# Altium PCB 2 Layers Matrix.PcbDoc
Units mm, origin at the board's own origin, x right, y up, seen from the top; angles counter-clockwise.
Board outline 70 x 70 mm, 2 copper layers (Top Layer, Bottom Layer), stack 1.569 mm thick; 68 components, 65 nets, 216 pads, 0 vias.
Unrouted connection lines stored in the file: 35.
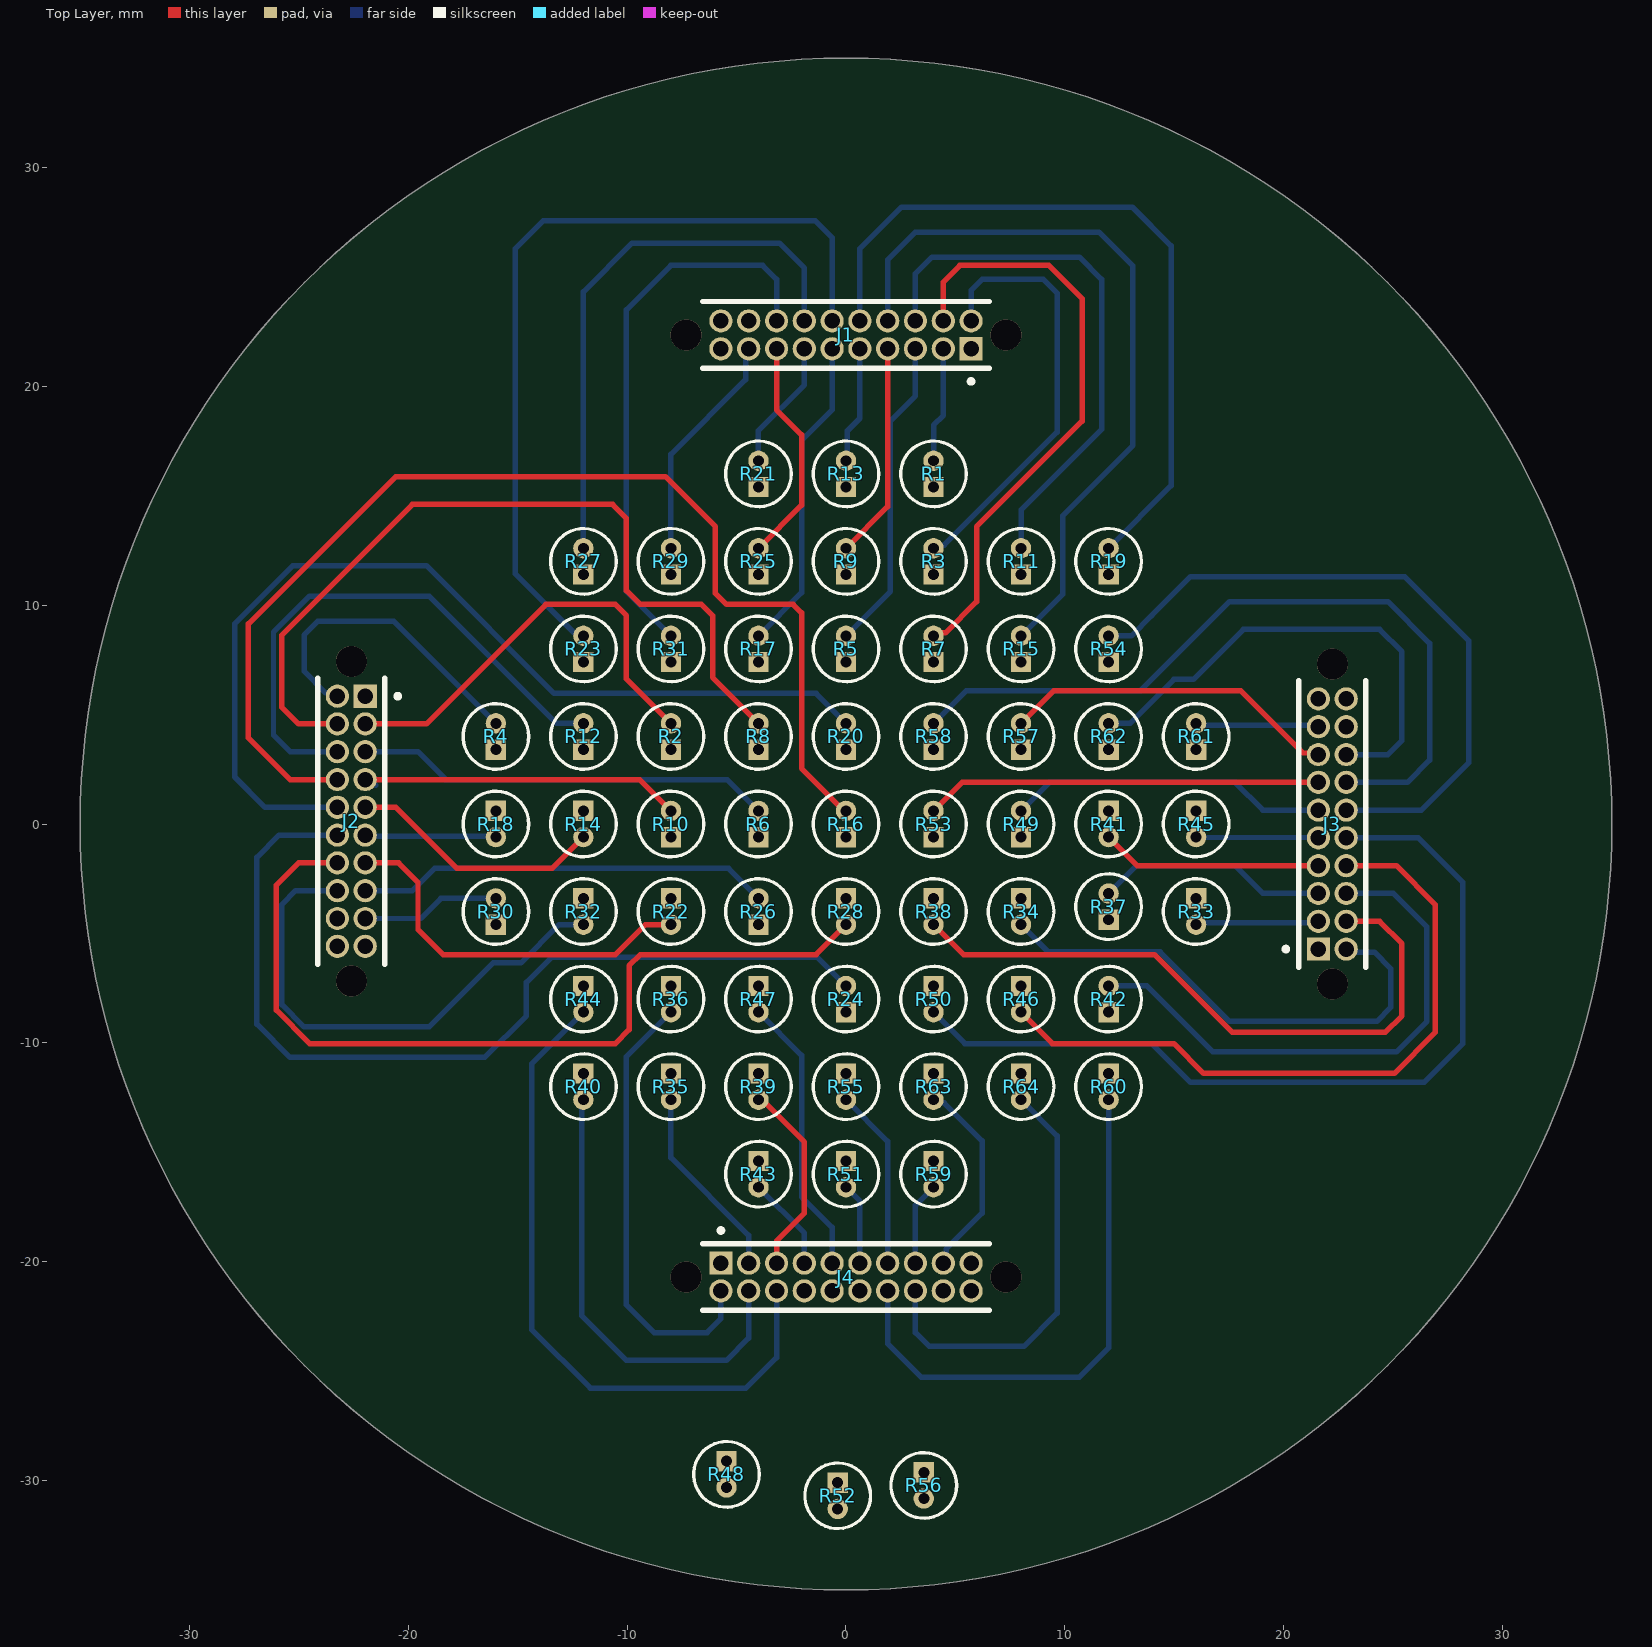
[diagram p0: Top Layer view]
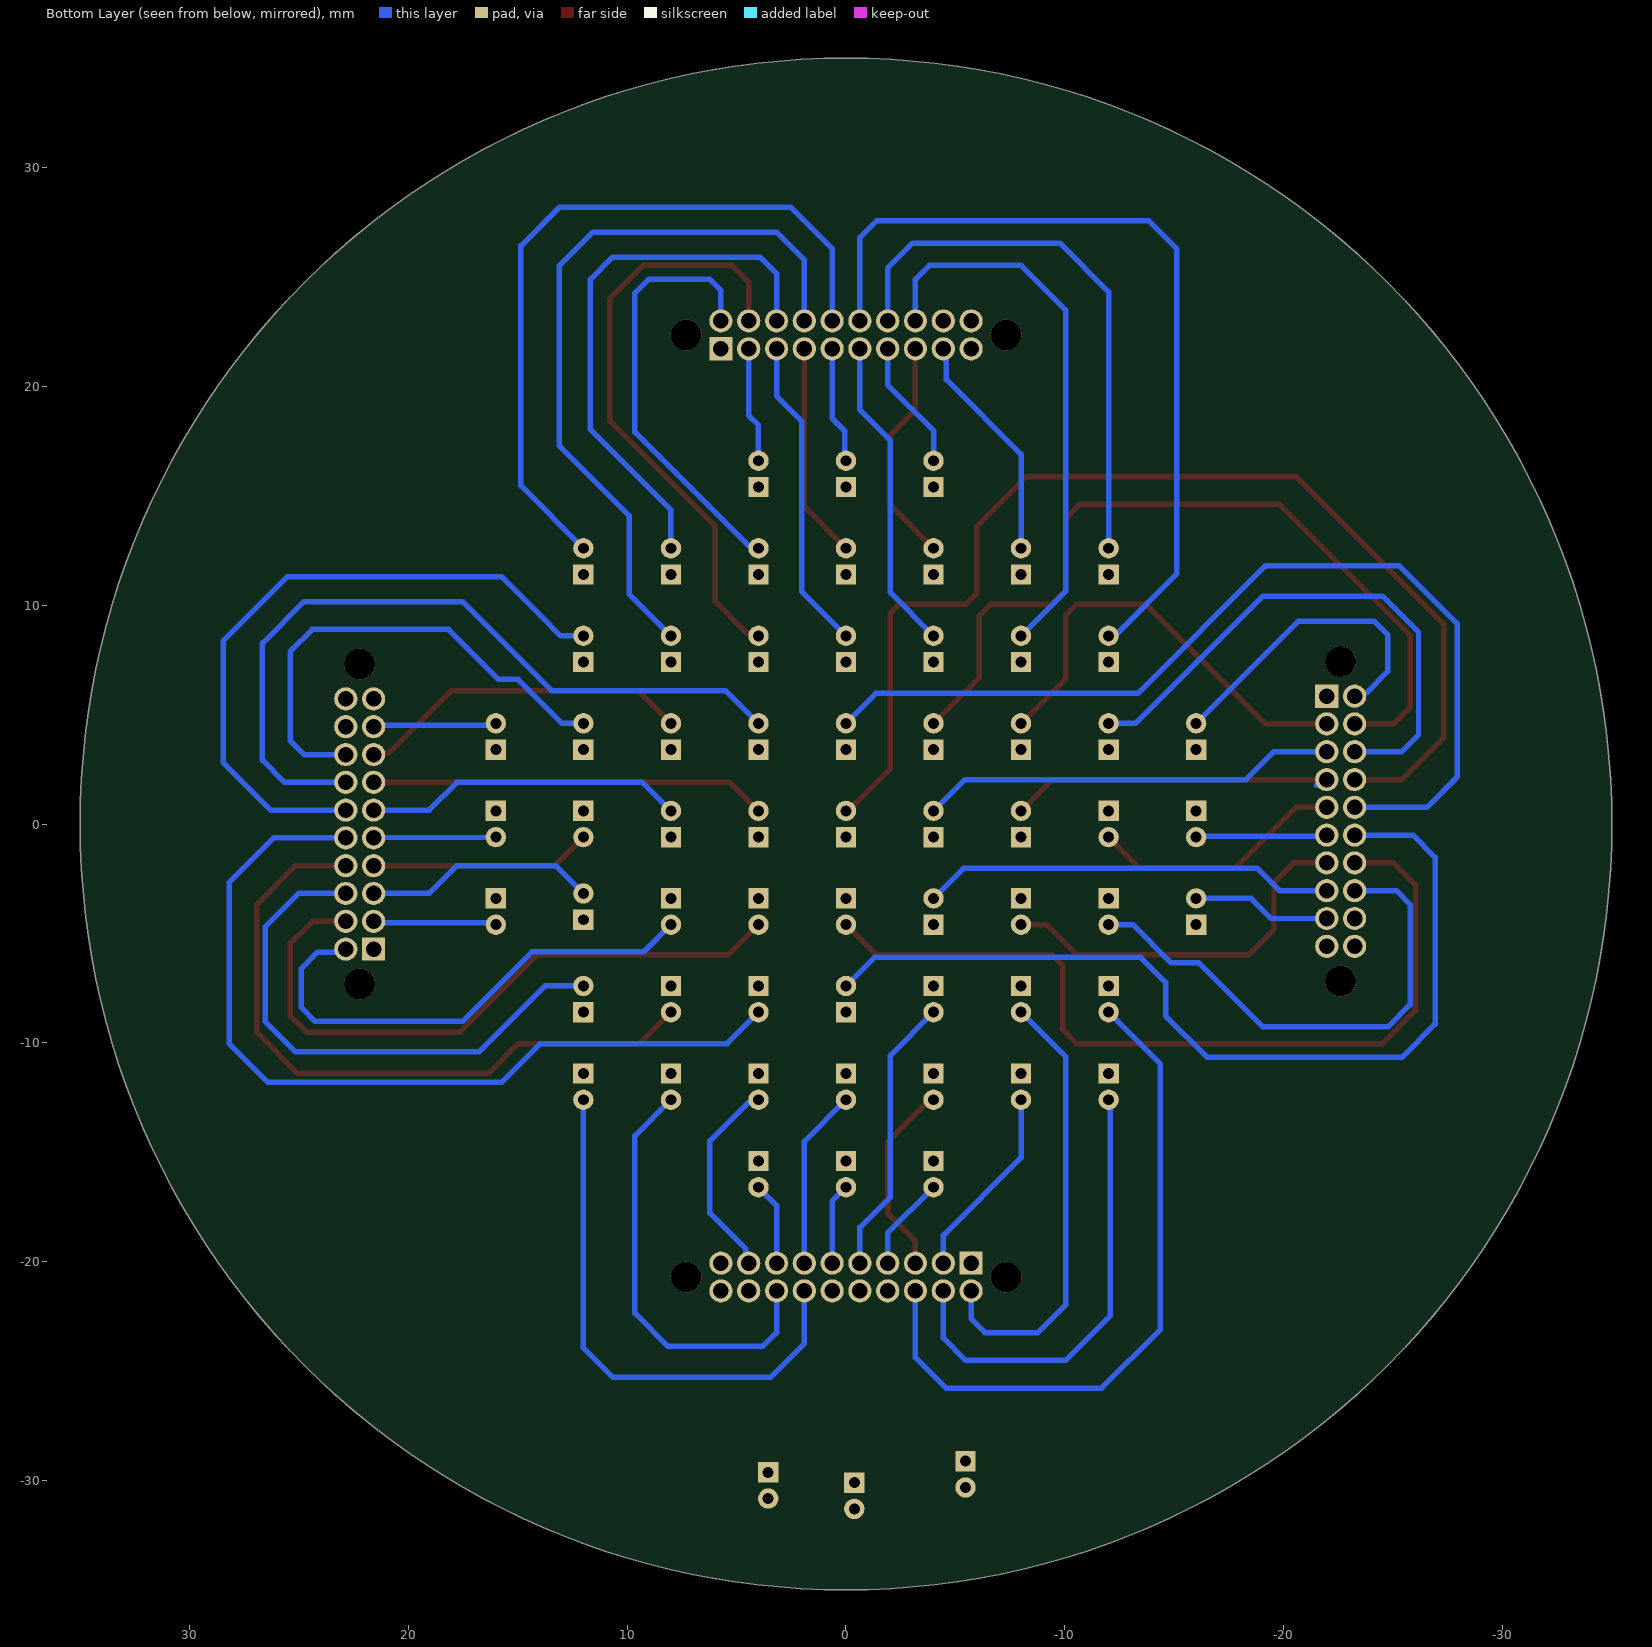
[diagram p1: Bottom Layer view, seen from below]
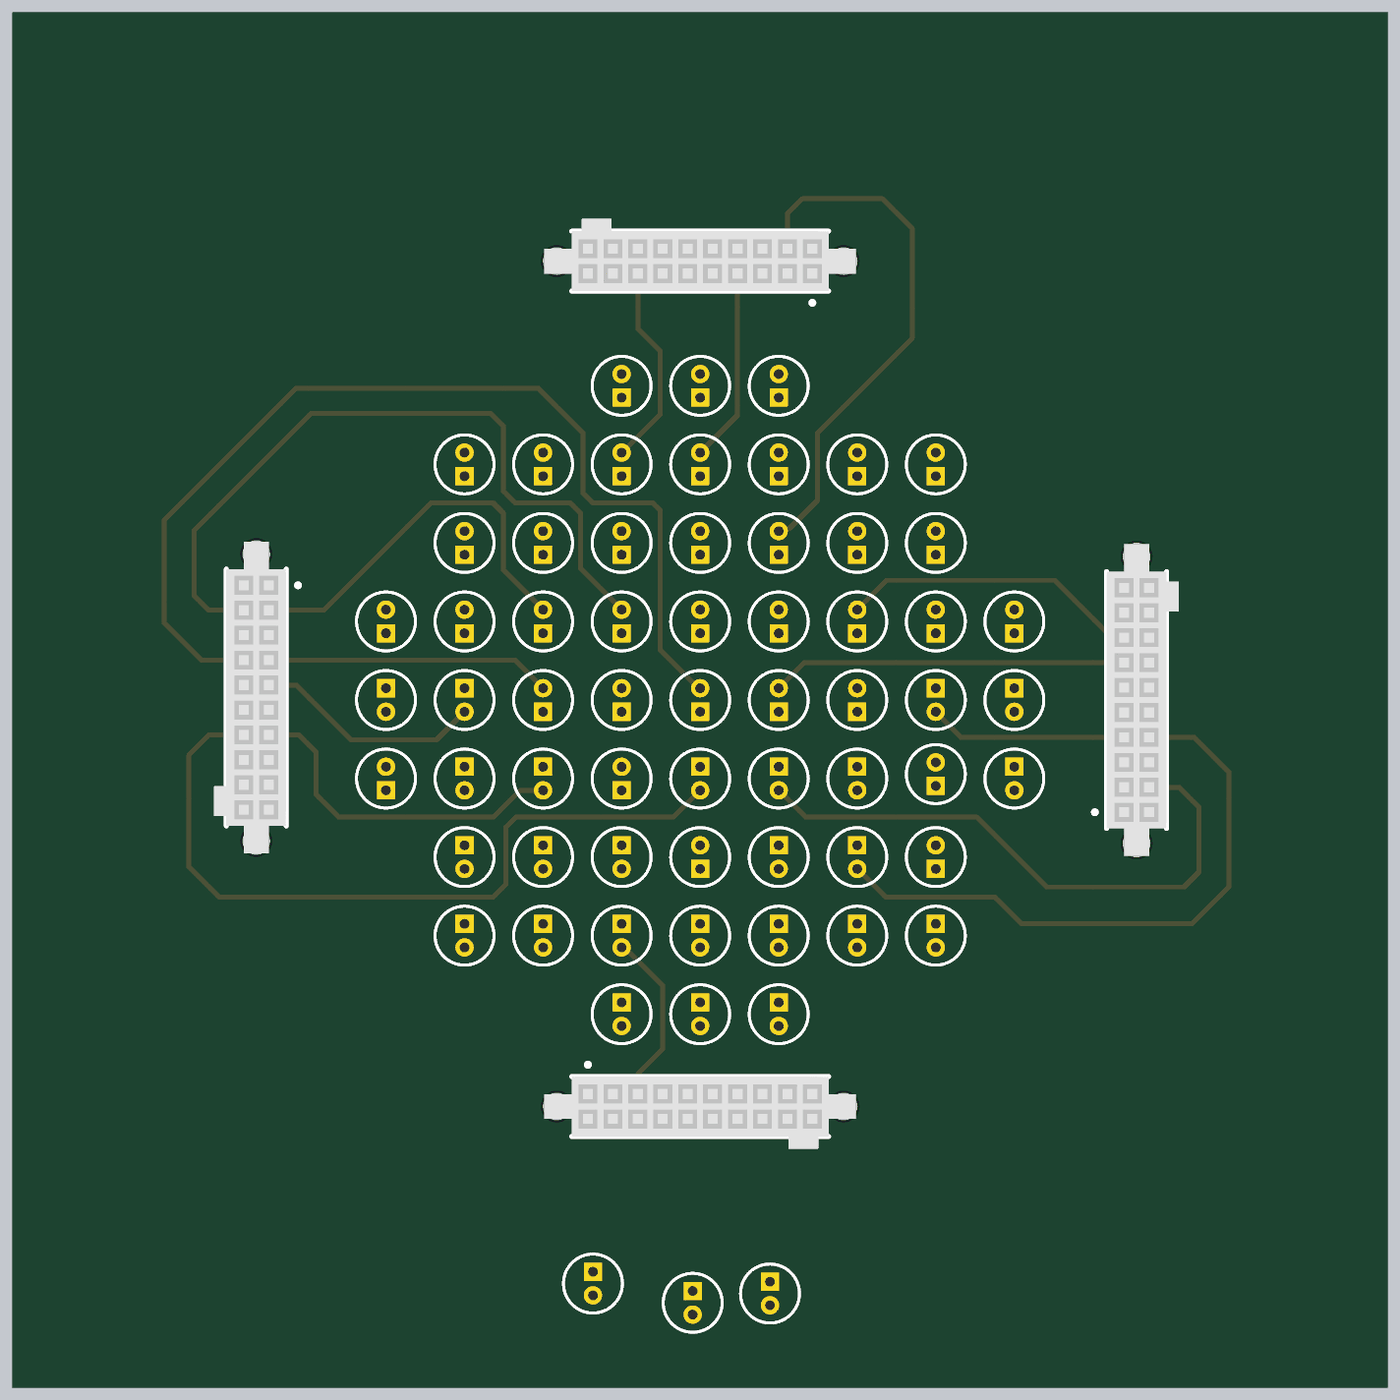
[diagram p2: 3D render of the assembled board from above, using the file's embedded part models]

## Layer stack, top to bottom
Top Solder: solder mask 0.0254, SM-001, Dk 4
Top Layer: signal copper 0.035
Dielectric 1: core 1.4986, Core-043, Dk 4.3
Bottom Layer: signal copper 0.035
Bottom Solder: solder mask 0.0254, SM-001, Dk 4

## Board outline
0,-35 cw(c0,0) -35,0 cw(c0,0) 0,35 cw(c0,0) 35,0 cw(c0,0)

## Design rules (kind name [scope] priority, off if disabled: settings)
BoardOutlineClearance [All] p1: gap=0.2 ignorepadtopadclearanceinfootprint=FALSE
Clearance [All] p1: gap=0.25 ignorepadtopadclearanceinfootprint=TRUE
HoleSize [All] p1: absolutevalues=TRUE maxlimit=6.2 minlimit=0.2 maxpercent=80.000 minpercent=20.000
MinimumAnnularRing MinimumAnnularRing_1 [All] p1: minimumring=0.15
PolygonConnect [All] p1: connectstyle=Relief reliefconductorwidth=0.254 reliefentries=4 polygonreliefangle="90 Angle" airgapwidth=0.254
RoutingVias [All] p1: holewidth=0.3 width=0.7 viastyle="Through Hole" minholewidth=0.3 minwidth=0.7 maxholewidth=0.3 maxwidth=0.7
SolderMaskExpansion [All] p1: expansion=0.102 istentingtop=FALSE
UnRoutedNet [All] p1: checkbadconnections=TRUE
Width [All] p1: maxlimit=0.25 minlimit=0.127 preferedwidth=0.2
28 further rules are at their usual default settings.

## Components (designator, comment, footprint, x,y, rotation, side; value= is the part's Value field where it differs from the comment)
J1 "SFC-110-T1-F-D-A" SFC-110-T1-F-D-A-Footprint-2 0,22.352 r0 top
J2 "SFC-110-T1-F-D-A" SFC-110-T1-F-D-A-Footprint-2 -22.606,0.127 r90 top
J3 "SFC-110-T1-F-D-A" SFC-110-T1-F-D-A-Footprint-2 22.225,0 r270 top
J4 "SFC-110-T1-F-D-A" SFC-110-T1-F-D-A-Footprint-2 0,-20.701 r180 top
R1 "NTCLE413E2103F524A" NTCLE413E2103F524A 4,16 r90 top
R2 "NTCLE413E2103F524A" NTCLE413E2103F524A -8,4 r90 top
R3 "NTCLE413E2103F524A" NTCLE413E2103F524A 4,12 r90 top
R4 "NTCLE413E2103F524A" NTCLE413E2103F524A -16,4 r90 top
R5 "NTCLE413E2103F524A" NTCLE413E2103F524A 0,8 r90 top
R6 "NTCLE413E2103F524A" NTCLE413E2103F524A -4,0 r90 top
R7 "NTCLE413E2103F524A" NTCLE413E2103F524A 4,8 r90 top
R8 "NTCLE413E2103F524A" NTCLE413E2103F524A -4,4 r90 top
R9 "NTCLE413E2103F524A" NTCLE413E2103F524A 0,12 r90 top
R10 "NTCLE413E2103F524A" NTCLE413E2103F524A -8,0 r90 top
R11 "NTCLE413E2103F524A" NTCLE413E2103F524A 8,12 r90 top
R12 "NTCLE413E2103F524A" NTCLE413E2103F524A -12,4 r90 top
R13 "NTCLE413E2103F524A" NTCLE413E2103F524A 0,16 r90 top
R14 "NTCLE413E2103F524A" NTCLE413E2103F524A -12,0 r270 top
R15 "NTCLE413E2103F524A" NTCLE413E2103F524A 8,8 r90 top
R16 "NTCLE413E2103F524A" NTCLE413E2103F524A 0,0 r90 top
R17 "NTCLE413E2103F524A" NTCLE413E2103F524A -4,8 r90 top
R18 "NTCLE413E2103F524A" NTCLE413E2103F524A -16,0 r270 top
R19 "NTCLE413E2103F524A" NTCLE413E2103F524A 12,12 r90 top
R20 "NTCLE413E2103F524A" NTCLE413E2103F524A 0,4 r90 top
R21 "NTCLE413E2103F524A" NTCLE413E2103F524A -4,16 r90 top
R22 "NTCLE413E2103F524A" NTCLE413E2103F524A -8,-4 r270 top
R23 "NTCLE413E2103F524A" NTCLE413E2103F524A -12,8 r90 top
R24 "NTCLE413E2103F524A" NTCLE413E2103F524A 0,-8 r90 top
R25 "NTCLE413E2103F524A" NTCLE413E2103F524A -4,12 r90 top
R26 "NTCLE413E2103F524A" NTCLE413E2103F524A -4,-4 r90 top
R27 "NTCLE413E2103F524A" NTCLE413E2103F524A -12,12 r90 top
R28 "NTCLE413E2103F524A" NTCLE413E2103F524A 0,-4 r270 top
R29 "NTCLE413E2103F524A" NTCLE413E2103F524A -8,12 r90 top
R30 "NTCLE413E2103F524A" NTCLE413E2103F524A -16,-4 r90 top
R31 "NTCLE413E2103F524A" NTCLE413E2103F524A -8,8 r90 top
R32 "NTCLE413E2103F524A" NTCLE413E2103F524A -12,-4 r270 top
R33 "NTCLE413E2103F524A" NTCLE413E2103F524A 16,-4 r270 top
R34 "NTCLE413E2103F524A" NTCLE413E2103F524A 8,-4 r270 top
R35 "NTCLE413E2103F524A" NTCLE413E2103F524A -8,-12 r270 top
R36 "NTCLE413E2103F524A" NTCLE413E2103F524A -8,-8 r270 top
R37 "NTCLE413E2103F524A" NTCLE413E2103F524A 12,-3.775 r90 top
R38 "NTCLE413E2103F524A" NTCLE413E2103F524A 4,-4 r270 top
R39 "NTCLE413E2103F524A" NTCLE413E2103F524A -4,-12 r270 top
R40 "NTCLE413E2103F524A" NTCLE413E2103F524A -12,-12 r270 top
R41 "NTCLE413E2103F524A" NTCLE413E2103F524A 12,0 r270 top
R42 "NTCLE413E2103F524A" NTCLE413E2103F524A 12,-8 r90 top
R43 "NTCLE413E2103F524A" NTCLE413E2103F524A -4,-16 r270 top
R44 "NTCLE413E2103F524A" NTCLE413E2103F524A -12,-8 r270 top
R45 "NTCLE413E2103F524A" NTCLE413E2103F524A 16,0 r270 top
R46 "NTCLE413E2103F524A" NTCLE413E2103F524A 8,-8 r270 top
R47 "NTCLE413E2103F524A" NTCLE413E2103F524A -4,-8 r270 top
R48 "NTCLE413E2103F524A" NTCLE413E2103F524A -5.461,-29.718 r270 top
R49 "NTCLE413E2103F524A" NTCLE413E2103F524A 8,0 r90 top
R50 "NTCLE413E2103F524A" NTCLE413E2103F524A 4,-8 r270 top
R51 "NTCLE413E2103F524A" NTCLE413E2103F524A 0,-16 r270 top
R52 "NTCLE413E2103F524A" NTCLE413E2103F524A -0.381,-30.699 r270 top
R53 "NTCLE413E2103F524A" NTCLE413E2103F524A 4,0 r90 top
R54 "NTCLE413E2103F524A" NTCLE413E2103F524A 12,8 r90 top
R55 "NTCLE413E2103F524A" NTCLE413E2103F524A 0,-12 r270 top
R56 "NTCLE413E2103F524A" NTCLE413E2103F524A 3.556,-30.226 r270 top
R57 "NTCLE413E2103F524A" NTCLE413E2103F524A 8,4 r90 top
R58 "NTCLE413E2103F524A" NTCLE413E2103F524A 4,4 r90 top
R59 "NTCLE413E2103F524A" NTCLE413E2103F524A 4,-16 r270 top
R60 "NTCLE413E2103F524A" NTCLE413E2103F524A 12,-12 r270 top
R61 "NTCLE413E2103F524A" NTCLE413E2103F524A 16,4 r90 top
R62 "NTCLE413E2103F524A" NTCLE413E2103F524A 12,4 r90 top
R63 "NTCLE413E2103F524A" NTCLE413E2103F524A 4,-12 r270 top
R64 "NTCLE413E2103F524A" NTCLE413E2103F524A 8,-12 r270 top

## Footprints (in the part's own frame and the unit in brackets; to place one, negate y for a bottom-side part, rotate by r counter-clockwise, add the part's x,y. Pads: shape width x height; smd on the part's side, far side on the other; paste and mask are expansions set on the pad)
NTCLE413E2103F524A [mm]
  rect 0.93x0.93 hole 0.5 paste-1000 mask+0: 1(-0.6,0)
  round 0.93 hole 0.5 paste-1000 mask+0: 2(0.6,0)
  silkscreen extent -1.5,-1.5 1.5,1.5, body extent -1.48,-1.5 1.48,1.5, height 1
SFC-110-T1-F-D-A-Footprint-2 [mm]
  rect 1.06x1.06 hole 0.71: 1(5.715,-0.635)
  round 1.06 hole 0.71: 2(5.715,0.635) 3(4.445,-0.635) 4(4.445,0.635) 5(3.175,-0.635) 6(3.175,0.635) 7(1.905,-0.635) 8(1.905,0.635) 9(0.635,-0.635) 10(0.635,0.635) 11(-0.635,-0.635) 12(-0.635,0.635) 13(-1.905,-0.635) 14(-1.905,0.635) 15(-3.175,-0.635) 16(-3.175,0.635) 17(-4.445,-0.635) 18(-4.445,0.635) 19(-5.715,-0.635) 20(-5.715,0.635)
  round 1.42 hole 1.42 unplated: ""(-7.305,0) ""(7.305,0)
  silkscreen extent -6.54,-2.22 6.54,1.53, body extent -7.94,-1.52 7.94,2.16, height 4.57

## Part data
J1 J2 J3 J4: library part CMP-002-00080-2, "Headers & Wire Housings .050 Tiger Eye Cost-Effective Reliable Socket Strip", Color=Black, Max Operating Temperature=125°C, Min Operating Temperature=-55°C, Voltage Rating (AC)=350V, Connector Type=Receptacle, Contact Finish - Mating=GOLD, Contact Material=Bronze, Contact Plating=Gold, Contact Shape=Square, Contact Type="Female Socket", Fastening Type=Pull, Gender=Female, Insulation Color=Black, Insulation Material=Polymer, Mounting Technology="Through Hole", Number of Contacts=20, Number of Positions=20, Number of Rows=2, Packaging=Rail/Tube, Pitch=0.05inch, RoHS Compliant=Yes, Row Spacing=0.05inch, Series="Tiger Eye™ SFC", Termination=Solder
R1 R2 R3 R4 R5 R6 R7 R8 R9 R10 R11 R12 R13 R14 R15 R16 R17 R18 R19 R20 R21 R22 R23 R24 R25 R26 R27 R28 R29 R30 R31 R32 R33 R34 R35 R36 R37 R38 R39 R40 R41 R42 R43 R44 R45 R46 R47 R48 R49 R50 R51 R52 R53 R54 R55 R56 R57 R58 R59 R60 R61 R62 R63 R64: library part CMP-009-00185-19, "NTC epoxy PVC AWG30 105°C 10K 1% 3435K 1% L52 A", RoHS Compliant=Yes

## Nets (pads, with @x,y where several pads share a name; then routed paths per layer and width w, separated by ;. In a path a pad name is that pad's centre, name@x,y a point inside that pad or via, vN(x,y) a via of type N, cw(c..) or ccw(c..) an arc to the next point about the centre after c; other vN are vias at no path point)
A1: J1.3 R1.2 | length 5.3
  Bottom Layer w0.25: R1.2 4,18.224 4.445,18.669 J1.3
A2: J1.5 R5.2 | length 14.4
  Bottom Layer w0.25: R5.2 2.032,10.632 2.032,18.415 3.175,19.558 J1.5
A3: J1.7 R9.2 | length 9.9
  Top Layer w0.25: R9.2 1.905,14.505 J1.7
A4: J1.9 R13.2 | length 5.4
  Bottom Layer w0.25: R13.2 0.064,16.664 0.064,17.97 0.635,18.542 J1.9
A5: J1.11 R17.2 | length 14.5
  Bottom Layer w0.25: R17.2 -2.032,10.568 -2.032,17.526 -0.635,18.923 J1.11
A6: J1.13 R21.2 | length 6
  Bottom Layer w0.25: R21.2 -4,17.971 -1.905,20.066 J1.13
A7: J1.15 R25.2 | length 10.4
  Top Layer w0.25: R25.2 -2.032,14.568 -2.032,17.78 -3.175,18.923 J1.15
  Bottom Layer w0.25: J1.15@-3.191,21.701 J1.15
A8: J1.17 R29.2 | length 10.6
  Bottom Layer w0.25: R29.2 -8,16.892 -4.588,20.304 -4.588,21.574 J1.17
A10: J1.2 R3.2 | length 20
  Bottom Layer w0.25: R3.2 4.14,12.74 4.485,12.74 9.652,17.907 9.652,24.257 9.017,24.892 6.223,24.892 5.715,24.384 J1.2
A11: J1.4 R7.2 | length 27.5
  Top Layer w0.25: R7.2 4.136,8.736 4.545,8.736 5.969,10.16 5.969,13.589 10.795,18.415 10.795,24.003 9.271,25.527 5.207,25.527 4.445,24.765 J1.4
A12: J1.6 R11.2 | length 25.2
  Bottom Layer w0.25: J1.6 3.175,25.146 3.937,25.908 10.668,25.908 11.684,24.892 11.684,18.034 8.001,14.351 R11.2 R11.2
A13: J1.8 R15.2 | length 34.2
  Bottom Layer w0.25: J1.8 1.905,25.781 3.175,27.051 11.557,27.051 13.108,25.5 13.108,17.299 9.906,14.097 9.906,10.506 R15.2
A14: J1.10 R19.2 | length 34.1
  Bottom Layer w0.25: J1.10 0.635,26.289 2.54,28.194 13.081,28.194 14.859,26.416 14.859,15.459 R19.2
A15: J1.12 R23.2 | length 38.3
  Bottom Layer w0.25: R23.2 -12.14,8.74 -12.423,8.74 -15.113,11.43 -15.113,26.289 -13.843,27.559 -1.397,27.559 -0.635,26.797 J1.12
A16: J1.14 R27.2 | length 25.6
  Bottom Layer w0.25: R27.2 -12,24.322 -9.779,26.543 -3.048,26.543 -1.905,25.4 J1.14
A17: J1.16 R31.2 | length 25.6
  Bottom Layer w0.25: R31.2 -10.033,10.633 -10.033,23.495 -8.001,25.527 -3.81,25.527 -3.175,24.892 J1.16
B1: J2.3 R2.2 | length 20.2
  Top Layer w0.25: J2.3 -19.177,4.572 -13.716,10.033 -10.541,10.033 -10.033,9.525 -10.033,6.633 R2.2
B2: J2.5 R6.2 | length 19.1
  Bottom Layer w0.25: J2.5 -19.558,3.302 -18.288,2.032 -5.432,2.032 R6.2
B3: J2.7 R10.2 | length 15.1
  Top Layer w0.25: J2.7 -9.432,2.032 R10.2
  Bottom Layer w0.25: J2.7 -21.752,2.032 -21.498,1.778
B4: J2.9 R14.2 | length 11.7
  Top Layer w0.25: J2.9 -20.574,0.762 -17.78,-2.032 -13.432,-2.032 R14.2
B5: J2.11 R18.2 | length 6
  Bottom Layer w0.25: J2.11 -21.925,-0.554 -16.046,-0.554 R18.2
B6: J2.13 R22.2 | length 17.5
  Top Layer w0.25: J2.13 -20.447,-1.778 -19.558,-2.667 -19.558,-4.826 -18.415,-5.969 -10.541,-5.969 -9.172,-4.6 R22.2
B7: J2.15 R26.2 | length 19
  Bottom Layer w0.25: J2.15 -19.812,-3.048 -18.796,-2.032 -5.368,-2.032 R26.2
B8: J2.17 R30.2 | length 6.4
  Bottom Layer w0.25: J2.17 -19.427,-4.318 -18.509,-3.4 R30.2
B10: J2.2 R4.2 | length 14.6
  Bottom Layer w0.25: J2.2 -23.396,5.997 -23.777,5.997 -24.765,6.985 -24.765,8.636 -24.13,9.271 -20.671,9.271 R4.2@-16.011,4.611
B11: J2.4 R8.2 | length 38.1
  Top Layer w0.25: J2.4 -25.019,4.572 -25.781,5.334 -25.781,8.636 -19.812,14.605 -10.668,14.605 -10.033,13.97 -10.033,10.668 -9.398,10.033 -6.604,10.033 -6.096,9.525 -6.096,6.696 R8.2
B12: J2.6 R12.2 | length 25.2
  Bottom Layer w0.25: J2.6 -25.4,3.302 -26.162,4.064 -26.162,8.763 -24.511,10.414 -19.05,10.414 -13.236,4.6 R12.2
B13: J2.8 R16.2 | length 52.4
  Top Layer w0.25: J2.8 -25.4,2.032 -27.305,3.937 -27.305,9.144 -20.574,15.875 -8.255,15.875 -5.969,13.589 -5.969,10.541 -5.461,10.033 -2.413,10.033 -2.032,9.652 -2.032,2.54 -0.092,0.6 R16.2
B14: J2.10 R20.2 | length 44.3
  Bottom Layer w0.25: J2.10 -26.543,0.762 -27.94,2.159 -27.94,9.144 -25.273,11.811 -19.177,11.811 -13.335,5.969 -1.369,5.969 R20.2
B15: J2.12 R24.2 | length 42.6
  Bottom Layer w0.25: J2.12 -25.908,-0.508 -26.924,-1.524 -26.924,-9.144 -25.4,-10.668 -16.51,-10.668 -14.605,-8.763 -14.605,-7.239 -13.462,-6.096 -1.304,-6.096 R24.2
B16: J2.14 R28.2 | length 39.6
  Top Layer w0.25: J2.14 -25.019,-1.778 -26.035,-2.794 -26.035,-8.509 -24.511,-10.033 -10.541,-10.033 -9.906,-9.398 -9.906,-6.477 -9.398,-5.969 -1.369,-5.969 R28.2
B17: J2.16 R32.2 | length 23.5
  Bottom Layer w0.25: J2.16 -25.146,-3.048 -25.781,-3.683 -25.781,-8.255 -24.765,-9.271 -19.05,-9.271 -16.129,-6.35 -14.859,-6.35 -13.109,-4.6 R32.2
C1: J3.3 R33.2 | length 5.7
  Bottom Layer w0.25: R33.2 16.077,-4.522 21.513,-4.522 J3.3
C2: J3.5 R37.2 | length 10.6
  Bottom Layer w0.25: R37.2 13.27,-1.905 17.78,-1.905 19.05,-3.175 J3.5
C3: J3.7 R41.2 | length 10.3
  Top Layer w0.25: R41.2 13.305,-1.905 J3.7
  Bottom Layer w0.25: J3.7@21.463,-1.778 J3.7
C4: J3.9 R45.2 | length 5.6
  Bottom Layer w0.25: R45.2 16.017,-0.617 21.572,-0.617 J3.9
C5: J3.11 R49.2 | length 14.7
  Bottom Layer w0.25: R49.2 9.305,1.905 17.78,1.905 19.05,0.635 J3.11
C6: J3.13 R53.2 | length 18.1
  Top Layer w0.25: R53.2 5.305,1.905 J3.13
C7: J3.15 R57.2 | length 15.4
  Top Layer w0.25: R57.2 9.496,6.096 18.034,6.096 20.886,3.244 21.521,3.244 J3.15
C8: J3.17 R61.2 | length 5.7
  Bottom Layer w0.25: R61.2 16.077,4.522 21.513,4.522 J3.17
C10: J3.2 R34.2 | length 22.9
  Bottom Layer w0.25: R34.2 9.242,-5.842 14.351,-5.842 17.526,-9.017 24.257,-9.017 24.892,-8.382 24.892,-6.604 24.146,-5.858 23.257,-5.858 J3.2@23.114,-5.715
C11: J3.4 R38.2 | length 30
  Top Layer w0.25: R38.2 5.369,-5.969 14.097,-5.969 17.653,-9.525 24.638,-9.525 25.4,-8.763 25.4,-5.461 24.384,-4.445 J3.4
C12: J3.6 R42.2 | length 24.7
  Bottom Layer w0.25: R42.2 13.75,-7.4 16.764,-10.414 25.146,-10.414 26.543,-9.017 26.543,-4.699 25.019,-3.175 J3.6@23.114,-3.175
C13: J3.8 R46.2 | length 31.5
  Top Layer w0.25: R46.2 9.433,-10.033 14.986,-10.033 16.345,-11.392 25.057,-11.392 26.924,-9.525 26.924,-3.683 25.146,-1.905 J3.8
C14: J3.10 R50.2 | length 39.5
  Bottom Layer w0.25: R50.2 5.433,-10.033 13.97,-10.033 15.748,-11.811 26.416,-11.811 28.194,-10.033 28.194,-2.667 26.162,-0.635 J3.10@23.114,-0.635
C15: J3.12 R54.2 | length 30.8
  Bottom Layer w0.25: R54.2 13.045,8.6 13.97,9.525 15.748,11.303 25.527,11.303 28.448,8.382 28.448,2.794 26.289,0.635 J3.12
C16: J3.14 R58.2 | length 35.3
  Bottom Layer w0.25: R58.2 5.496,6.096 13.462,6.096 17.526,10.16 24.765,10.16 26.67,8.255 26.67,2.921 25.654,1.905 J3.14
C17: J3.16 R62.2 | length 22.5
  Bottom Layer w0.25: R62.2 12.982,4.6 14.986,6.604 15.875,6.604 18.161,8.89 24.384,8.89 25.4,7.874 25.4,3.81 24.765,3.175 J3.16
D1: J4.3 R35.2 | length 8.9
  Bottom Layer w0.25: R35.2 -8,-15.241 -4.445,-18.796 J4.3
D2: J4.5 R39.2 | length 9
  Top Layer w0.25: R39.2 -3.837,-12.6 -1.905,-14.532 -1.905,-17.78 -3.175,-19.05 J4.5
D3: J4.7 R43.2 | length 4.3
  Bottom Layer w0.25: R43.2 -1.905,-18.695 J4.7
D4: J4.9 R47.2 | length 12.9
  Bottom Layer w0.25: R47.2 -2.032,-10.568 -2.032,-17.035 -0.635,-18.432 J4.9
D5: J4.11 R51.2 | length 3.7
  Bottom Layer w0.25: R51.2 0.635,-17.235 J4.11
D6: J4.13 R55.2 | length 8.3
  Bottom Layer w0.25: R55.2 1.905,-14.505 J4.13
D7: J4.15 R59.2 | length 3.8
  Bottom Layer w0.25: J4.15 3.175,-17.425 R59.2
D8: J4.17 R63.2 | length 9.3
  Bottom Layer w0.25: R63.2 4.14,-12.74 4.485,-12.74 6.223,-14.478 6.223,-17.78 4.578,-19.425 4.578,-19.933 J4.17
D10: J4.2 R36.2 | length 20.6
  Bottom Layer w0.25: R36.2 -10.033,-10.633 -10.033,-21.971 -8.763,-23.241 -6.35,-23.241 -5.715,-22.606 J4.2
D11: J4.4 R40.2 | length 20.9
  Bottom Layer w0.25: R40.2 -12.065,-12.665 -12.065,-22.479 -10.033,-24.511 -5.461,-24.511 -4.445,-23.495 J4.4
D12: J4.6 R44.2 | length 31.4
  Bottom Layer w0.25: R44.2 -14.351,-10.951 -14.351,-23.114 -11.684,-25.781 -4.572,-25.781 -3.175,-24.384 J4.6
D13: J4.8 R48.2
D14: J4.10 R52.2
D15: J4.12 R56.2
D16: J4.14 R60.2 | length 25
  Bottom Layer w0.25: J4.14 1.905,-23.749 3.429,-25.273 10.668,-25.273 12,-23.941 R60.2
D17: J4.16 R64.2 | length 19.7
  Bottom Layer w0.25: J4.16 3.175,-23.241 3.81,-23.876 8.128,-23.876 9.652,-22.352 9.652,-14.252 R64.2
GND: J1.1 J1.18 J1.19 J1.20 J2.1 J2.18 J2.19 J2.20 J3.1 J3.18 J3.19 J3.20 J4.1 J4.18 J4.19 J4.20 R1.1 R2.1 R3.1 R4.1 R5.1 R6.1 R7.1 R8.1 R9.1 R10.1 R11.1 R12.1 R13.1 R14.1 R15.1 R16.1 R17.1 R18.1 R19.1 R20.1 R21.1 R22.1 R23.1 R24.1 R25.1 R26.1 R27.1 R28.1 R29.1 R30.1 R31.1 R32.1 R33.1 R34.1 R35.1 R36.1 R37.1 R38.1 R39.1 R40.1 R41.1 R42.1 R43.1 R44.1 R45.1 R46.1 R47.1 R48.1 R49.1 R50.1 R51.1 R52.1 R53.1 R54.1 R55.1 R56.1 R57.1 R58.1 R59.1 R60.1 R61.1 R62.1 R63.1 R64.1
pads on no net: J1. J2. J3. J4.